# EAGLE board switch (EAGLE 7.4.0)
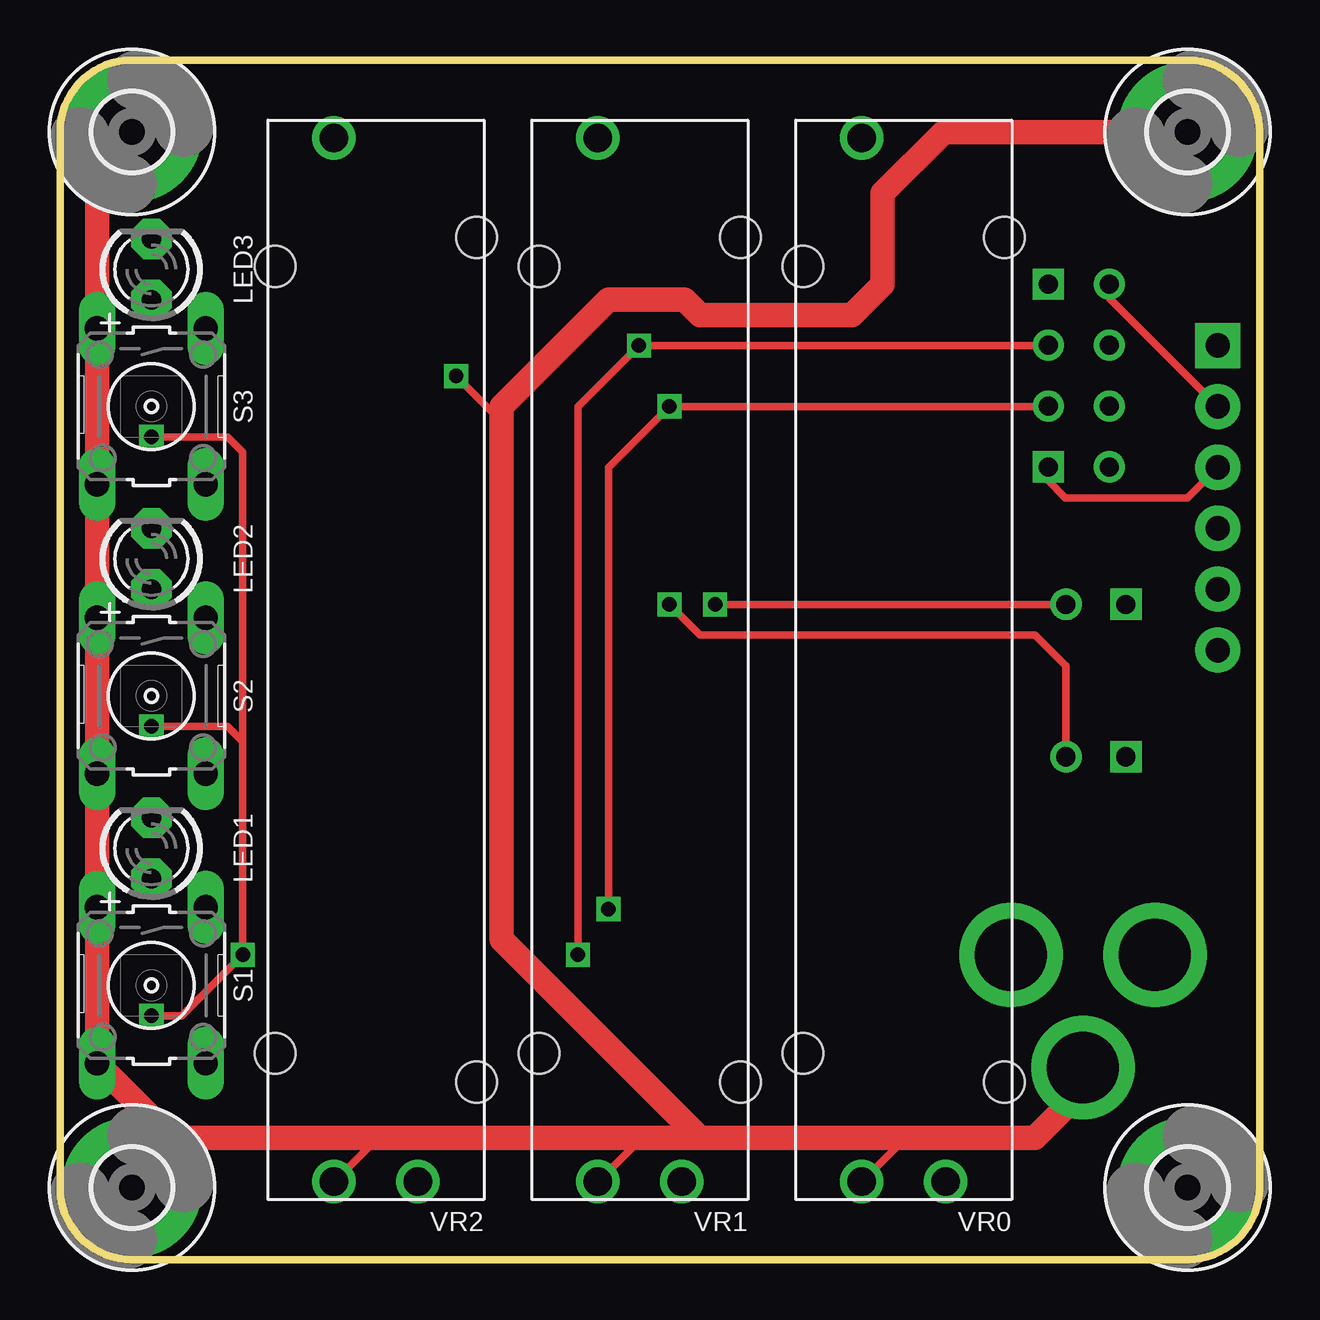
[diagram p0: board, top side]
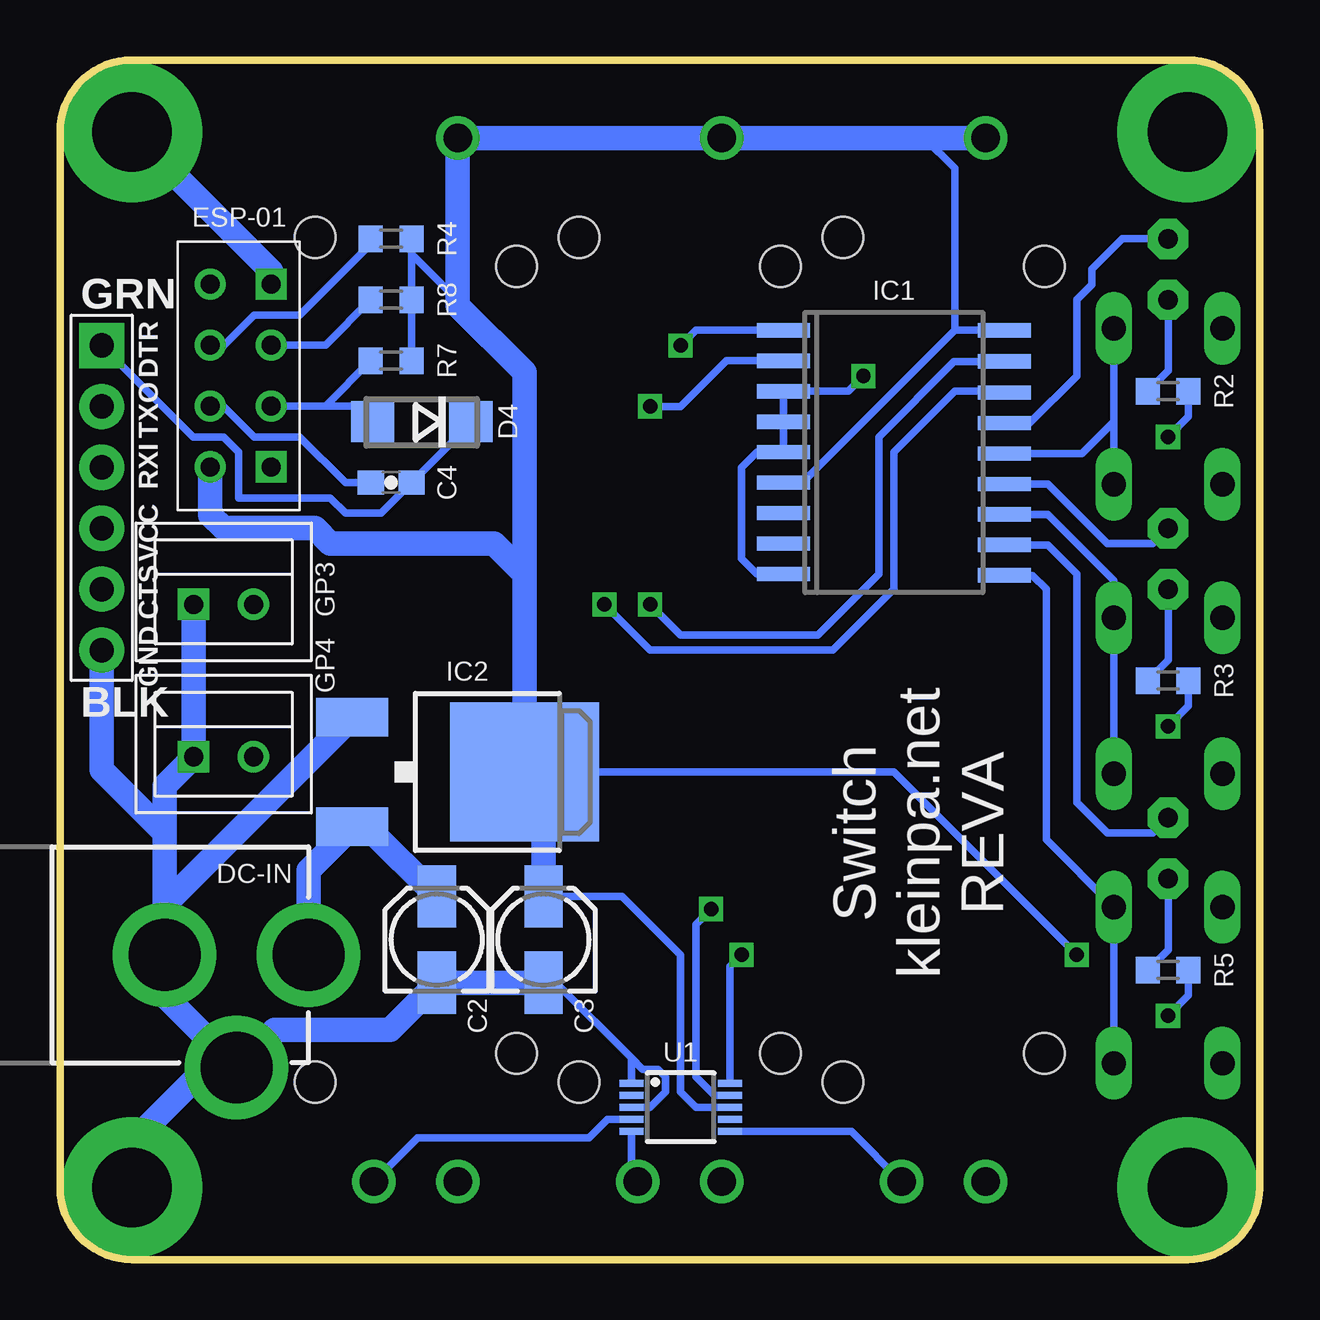
[diagram p1: board, bottom side, seen from below]

Size 50 x 50 mm. Coordinates in mm from the lower left corner, seen from the top.
Outline: 0,47 0,3 arc90 3,0 47,0 arc90 50,3 50,47 arc90 47,50 3,50 arc90 0,47
Copper layers (1*16): Top 0.035mm / dielectric 1.5mm / Bottom 0.035mm
Design rules "default *": minimum track width 10mil, minimum drill 24mil, track to track 8mil, track to pad 8mil, pad to pad 8mil, via to via 8mil, smd to smd 8mil, copper to edge 20mil, drill to drill 8mil, minimum pad ring 10mil, minimum via ring 8mil, stop-mask expansion 4mil, vias tented up to drill 0mil, thermal gap 10mil
Net classes: 1 ext: width 1.93 mm, clearance 1 mm; 2 5v: width 0.61 mm

## Footprints (pad centres in the part's own frame; a part is rotated, then mirrored left to right if it is on the bottom)
153CLV-0405 = smd 2.6 x 1.6: + 1.8,0; - -1.8,0
0603-CAP = smd 1.1 x 1: 1 -0.85,0; 2 0.85,0
DO214AC = smd 1.8 x 1.7: A 2.05,0; C -2.05,0
POWER_JACK_PTH = drill 2.997 pad 4.318: GND 0,7.7; GNDBREAK 4.7,10.7; PWR 0,13.7
ESP01 = drill 0.8: CH_PD -1.285,-1.192; GPIO0 1.255,1.347; GPIO2 -1.285,1.347; RST 1.255,-1.192; TX -3.825,-1.192; VCC 3.795,-1.192 | drill 0.8 square: GND -3.825,1.347; RX 3.795,1.347
B2B-XH = drill 0.8 square: P$1 -1.25,0 | drill 0.8: P$2 1.25,0
3,3-PAD = drill 3.3 pad 5.842: B3,3 0,0
SO18W = smd 0.6 x 2.2: 1 -4.445,-4.6; 2 -3.175,-4.6; 3 -1.905,-4.6; 4 -0.635,-4.6; 5 0.635,-4.6; 6 1.905,-4.6; 7 3.175,-4.6; 8 4.445,-4.6; 9 5.715,-4.6; 10 5.775,4.6; 11 4.505,4.6; 12 3.235,4.6; 13 1.965,4.6; 14 0.695,4.6; 15 -0.575,4.6; 16 -1.845,4.6; 17 -3.145,4.6; 18 -4.445,4.6
DPACK = smd 1.6 x 3: 1 -2.28,-4.8; 3 2.28,-4.8 | smd 5.8 x 6.2: 4 0,2.38
FTDI_DEVICE_SIDE = drill 1.016 pad 1.88 square: P$1 -6.35,0 | drill 1.016 pad 1.88: P$2 -3.81,0; P$3 -1.27,0; P$4 1.27,0; P$5 3.81,0; P$6 6.35,0
LED3MM = drill 0.813 pad 1.676 octagon: A -1.27,0; K 1.27,0
R0603 = smd 1 x 1.1: 1 -0.85,0; 2 0.85,0
B3F-10XX = drill 1.016 long: 1 -3.251,2.261; 2 3.251,2.261; 3 -3.251,-2.261; 4 3.251,-2.261
MSOP10 = smd 0.3 x 1: 1 -1,-2.05; 2 -0.5,-2.05; 3 0,-2.05; 4 0.5,-2.05; 5 1,-2.05; 6 1,2.05; 7 0.5,2.05; 8 0,2.05; 9 -0.5,2.05; 10 -1,2.05
PTA3043-2015CPB103 = drill 1.2: P$1 -21.75,1.75; P$2 -21.75,-1.75; P$3 21.75,1.75 | hole 1.7: -16.4,4.2; 16.4,4.2; -17.6,-4.2; 17.6,-4.2

## Placement (x,y rotation side)
C2  10uF  [153CLV-0405]  34.29,13.34 90 bottom
C3  10uF  [153CLV-0405]  29.84,13.34 90 bottom
C4  .1uF  [0603-CAP]  36.2,32.38 0 bottom
D4  [DO214AC]  34.92,34.92 180 bottom
DC-IN  POWER_JACKPTH  [POWER_JACK_PTH]  53.34,12.7 270 bottom
ESP-01  ESP01  [ESP01]  42.55,36.83 270 bottom
GP3  02-JST  [B2B-XH]  43.18,27.3 0 bottom
GP4  02-JST  [B2B-XH]  43.18,20.95 0 bottom
H1  MOUNT-PAD-ROUND3.3  [3,3-PAD]  47,3 0 top
H2  MOUNT-PAD-ROUND3.3  [3,3-PAD]  3,3 0 top
H3  MOUNT-PAD-ROUND3.3  [3,3-PAD]  47,47 0 top
H4  MOUNT-PAD-ROUND3.3  [3,3-PAD]  3,47 0 top
IC1  MCP2300X/SO  [SO18W]  15.24,34.29 270 bottom
IC2  LM1117  [DPACK]  33.02,20.32 270 bottom
JP2  FTDI_DEVICE  [FTDI_DEVICE_SIDE]  48.26,31.75 270 bottom
LED1  [LED3MM]  3.81,17.14 90 top
LED2  [LED3MM]  3.81,29.21 90 top
LED3  [LED3MM]  3.81,41.27 90 top
R2  70  [R0603]  3.81,36.2 180 bottom
R3  70  [R0603]  3.81,24.13 180 bottom
R4  10k  [R0603]  36.2,42.55 0 bottom
R5  70  [R0603]  3.81,12.06 180 bottom
R7  10k  [R0603]  36.2,37.47 0 bottom
R8  10k  [R0603]  36.2,40.01 0 bottom
S1  [B3F-10XX]  3.81,11.43 270 top
S2  [B3F-10XX]  3.81,23.5 270 top
S3  [B3F-10XX]  3.81,35.56 270 top
U1  ADS1015  [MSOP10]  24.13,6.35 270 bottom
VR0  [PTA3043-2015CPB103]  35.17,25 90 top
VR1  [PTA3043-2015CPB103]  24.17,25 90 top
VR2  [PTA3043-2015CPB103]  13.17,25 90 top

## Library data of the parts
C2 C3 = rcl
C4 = SparkFun-Passives
D4 = diode
DC-IN = SparkFun-Connectors; PROD_ID: CONN-08197
ESP-01 = esp8266modules-pk
GP3 GP4 = con-jst-xh
H1-H4 = holes
IC1 LED1-LED3 = adafruit
IC2 = v-reg
JP2 = SparkFun-Connectors
R2-R5 R7 R8 = resistor
S1-S3 = switch-omron; MPN: B3F-1000; OC_FARNELL: 176432; OC_NEWARK: 36M3542
U1 = SparkFun-AnalogIC; PROD_ID: IC-12239
VR0 VR1 VR2 = SparkFun-Electromechanical

## Nets
+3V3: C3.+ ESP-01.VCC IC1.6 IC1.18 IC2.4 R2.1 R3.1 R4.2 R5.1 R7.2 R8.2 U1.8 VR0.P$3 VR1.P$3 VR2.P$3
GND: C2.- C3.- DC-IN.GND DC-IN.GNDBREAK ESP-01.GND GP3.P$1 GP4.P$1 H1.B3,3 H2.B3,3 H3.B3,3 H4.B3,3 IC1.3 IC1.4 IC1.5 IC1.9 IC2.1 JP2.P$6 S1.3 S1.4 S2.3 S2.4 S3.3 S3.4 U1.1 U1.3 VR0.P$1 VR1.P$1 VR2.P$1
GP0: IC1.10 S1.1 S1.2
GP1: IC1.11 LED1.K
GP2: IC1.12 S2.1 S2.2
GP3: IC1.13 LED2.K
GP4: IC1.14 S3.1 S3.2
GP5: IC1.15 LED3.K
GP6: GP3.P$2 IC1.16
GP7: GP4.P$2 IC1.17
I2C_SCL: ESP-01.GPIO2 IC1.1 R8.1 U1.10
I2C_SDA: D4.A ESP-01.GPIO0 IC1.2 R7.1 U1.9
N$1: ESP-01.CH_PD R4.1
N$2: C4.2 D4.C JP2.P$1
N$3: U1.6 VR2.P$2
N$4: U1.5 VR1.P$2
N$5: U1.4 VR0.P$2
N$6: LED1.A R5.2
N$8: LED2.A R3.2
N$10: LED3.A R2.2
RST: C4.1 ESP-01.RST
RXI: ESP-01.RX JP2.P$3
TXO: ESP-01.TX JP2.P$2
VCC: C2.+ DC-IN.PWR IC2.3

## Tracks (layer width: path | path; a pad name or v marks a point on that pad's centre or on a via)
+3V3  (via drill 0.6)
  Top 0.305: 7.62,21.59 7.62,33.66 6.99,34.29 v3.81,34.29 | 7.62,21.59 v7.62,12.7 5.08,10.16 v3.81,10.16 | v3.81,22.23 6.99,22.23 7.62,21.59
  Bottom 0.305: R7.2 R8.2 35.34,41.91 | 35.34,41.91 R4.2 | C3.+ 26.57,15.13 24.13,12.7 24.13,6.99 23.5,6.35 U1.8 | R2.1 2.96,35.14 v3.81,34.29 | R3.1 2.96,23.07 v3.81,22.23 | R5.1 2.96,11.01 v3.81,10.16 | 33.42,39.77 33.42,39.98 35.34,41.91 | IC1.18 12.7,38.73 | 12.7,38.73 19.05,32.38 IC1.6 | 12.7,38.73 12.7,45.48 13.97,46.75 | IC2.4 15.24,20.32 v7.62,12.7
  Bottom 1.016: ESP-01.VCC 43.74,31.04 43.18,30.48 39.37,30.48 38.73,29.84 31.91,29.84 30.64,28.57 | 30.64,28.57 IC2.4 29.84,19.52 C3.+ | 30.64,28.57 30.64,36.99 33.42,39.77 VR0.P$3 VR1.P$3 13.97,46.75 VR2.P$3
GND  (via drill 0.6)
  Top 0.305: VR2.P$1 13.25,5.08 24.25,5.08 | VR1.P$1 24.25,5.08 | 24.25,5.08 26.67,5.08 | v16.51,36.83 18.41,34.92 18.41,34.29 | VR0.P$1 35.25,5.08 35.56,5.08
  Top 1.016: 26.67,5.08 18.41,13.34 18.41,34.29 18.41,35.56 22.86,40.01 26.04,40.01 26.67,39.37 33.02,39.37 34.29,40.64 34.29,44.45 36.84,47 H3.B3,3 | 26.67,5.08 5.08,5.08 | 5.08,5.08 H2.B3,3 | 5.08,5.08 4.65,5.08 S1.4 S1.3 S2.4 S2.3 S3.4 S3.3 1.55,45.55 H4.B3,3 | 26.67,5.08 35.56,5.08 40.64,5.08 42.64,7.08 DC-IN.GNDBREAK
  Bottom 0.305: U1.1 26.18,8.4 | U1.3 25.4,6.35 24.77,6.99 24.77,7.62 25.08,7.94 25.72,7.94 26.18,8.4 | 26.18,8.4 29.32,11.54 C3.- | IC1.9 20.95,28.57 21.59,29.21 21.59,33.02 20.95,33.66 IC1.5 IC1.4 IC1.3 17.14,36.2 v16.51,36.83
  Bottom 1.016: 45.64,12.27 DC-IN.GND | H1.B3,3 47,4.91 43.91,8 DC-IN.GNDBREAK | ESP-01.GND 41.2,41.2 H3.B3,3 | DC-IN.GND 45.64,17.78 | 45.64,17.78 45.64,19.75 GP4.P$1 GP3.P$1 | JP2.P$6 48.26,20.4 45.64,17.78 | DC-IN.GND 45.64,14.78 IC2.1 | C3.- C2.- 36.25,9.58 41.06,9.58 DC-IN.GNDBREAK | DC-IN.GNDBREAK 45.64,11 DC-IN.GND
GP0
  Bottom 0.305: 10.86,28.52 IC1.10 9.46,28.52 8.89,27.94 8.89,17.5 S1.1 S1.2
GP1
  Bottom 0.305: IC1.11 8.83,29.79 7.62,28.57 7.62,19.05 6.35,17.78 4.45,17.78 LED1.K
GP2
  Bottom 0.305: S2.2 S2.1 6.07,28.3 8.83,31.05 IC1.12
GP3
  Bottom 0.305: IC1.13 8.83,32.33 6.35,29.84 4.45,29.84 LED2.K
GP4
  Bottom 0.305: S3.2 6.07,34.92 | 6.07,34.92 S3.1 | IC1.14 7.4,33.59 6.07,34.92
GP5
  Bottom 0.305: IC1.15 9.59,34.87 7.62,36.83 7.62,40.01 6.99,40.64 6.99,41.27 5.71,42.55 LED3.K
GP6  (via drill 0.6)
  Top 0.305: GP3.P$2 v27.3,27.3
  Bottom 0.305: IC1.16 10.7,36.2 12.7,36.2 15.24,33.66 15.24,27.94 17.78,25.4 25.4,25.4 v27.3,27.3
GP7  (via drill 0.6)
  Top 0.305: GP4.P$2 41.93,24.75 arc90 41.91,24.77 40.64,26.04 26.67,26.04 v25.4,27.3
  Bottom 0.305: v25.4,27.3 24.13,26.04 18.41,26.04 15.88,28.57 15.88,34.29 12.73,37.44 IC1.17
I2C_SCL  (via drill 0.6)
  Top 0.305: ESP-01.GPIO2 41.18,38.1 v24.13,38.1 21.59,35.56 v21.59,12.7
  Bottom 0.305: ESP-01.GPIO2 38.94,38.12 R8.1 | v24.13,38.1 23.5,38.73 IC1.1 | v21.59,12.7 22.08,12.21 U1.10
I2C_SDA  (via drill 0.6)
  Top 0.305: ESP-01.GPIO0 41.18,35.56 v25.4,35.56 22.86,33.02 v22.86,14.61
  Bottom 0.305: R7.1 38.94,35.58 ESP-01.GPIO0 37.62,35.58 D4.A | v25.4,35.56 24.13,35.56 22.23,37.47 IC1.2 | v22.86,14.61 23.5,13.97 23.5,7.62 22.73,6.85 U1.9
N$1
  Bottom 0.305: R4.1 37.05,42.33 40.01,39.37 41.91,39.37 43.18,38.1 43.72,38.1 ESP-01.CH_PD
N$2
  Bottom 0.305: D4.C 32.88,34.85 C4.2 36.62,31.11 38.1,31.11 38.73,31.75 42.55,31.75 42.55,33.66 43.18,34.29 44.45,34.29 JP2.P$1
N$3
  Bottom 0.305: U1.6 17.02,5.35 VR2.P$2
N$4
  Bottom 0.305: U1.5 26.18,3.51 VR1.P$2
N$5
  Bottom 0.305: U1.4 27.17,5.85 27.94,5.08 35.09,5.08 VR0.P$2
N$6
  Bottom 0.305: LED1.A 3.81,12.91 R5.2
N$8
  Bottom 0.305: LED2.A 3.81,24.98 R3.2
N$10
  Bottom 0.305: LED3.A 3.81,37.05 R2.2
RST
  Bottom 0.305: ESP-01.RST 43.72,35.56 43.18,35.56 41.91,34.29 40.01,34.29 38.1,32.38 C4.1
RXI
  Top 0.305: ESP-01.RX 41.2,32.46 41.91,31.75 46.99,31.75 JP2.P$3
TXO
  Top 0.305: ESP-01.TX 43.74,40.08 JP2.P$2
VCC
  Bottom 1.016: DC-IN.PWR 39.64,16.22 IC2.3 37.2,18.04 C2.+

## Text on the board
bNames: Switch / kleinpa.net / REVA